# Altium PCB PCB.PcbDoc
Units mm, origin at the board's own origin, x right, y up, seen from the top; angles counter-clockwise.
Board outline 85 x 76 mm, 2 copper layers (Top Layer, Bottom Layer), stack 1.569 mm thick; 53 components, 43 nets, 226 pads, 47 vias.
Unrouted connection lines stored in the file: 40.
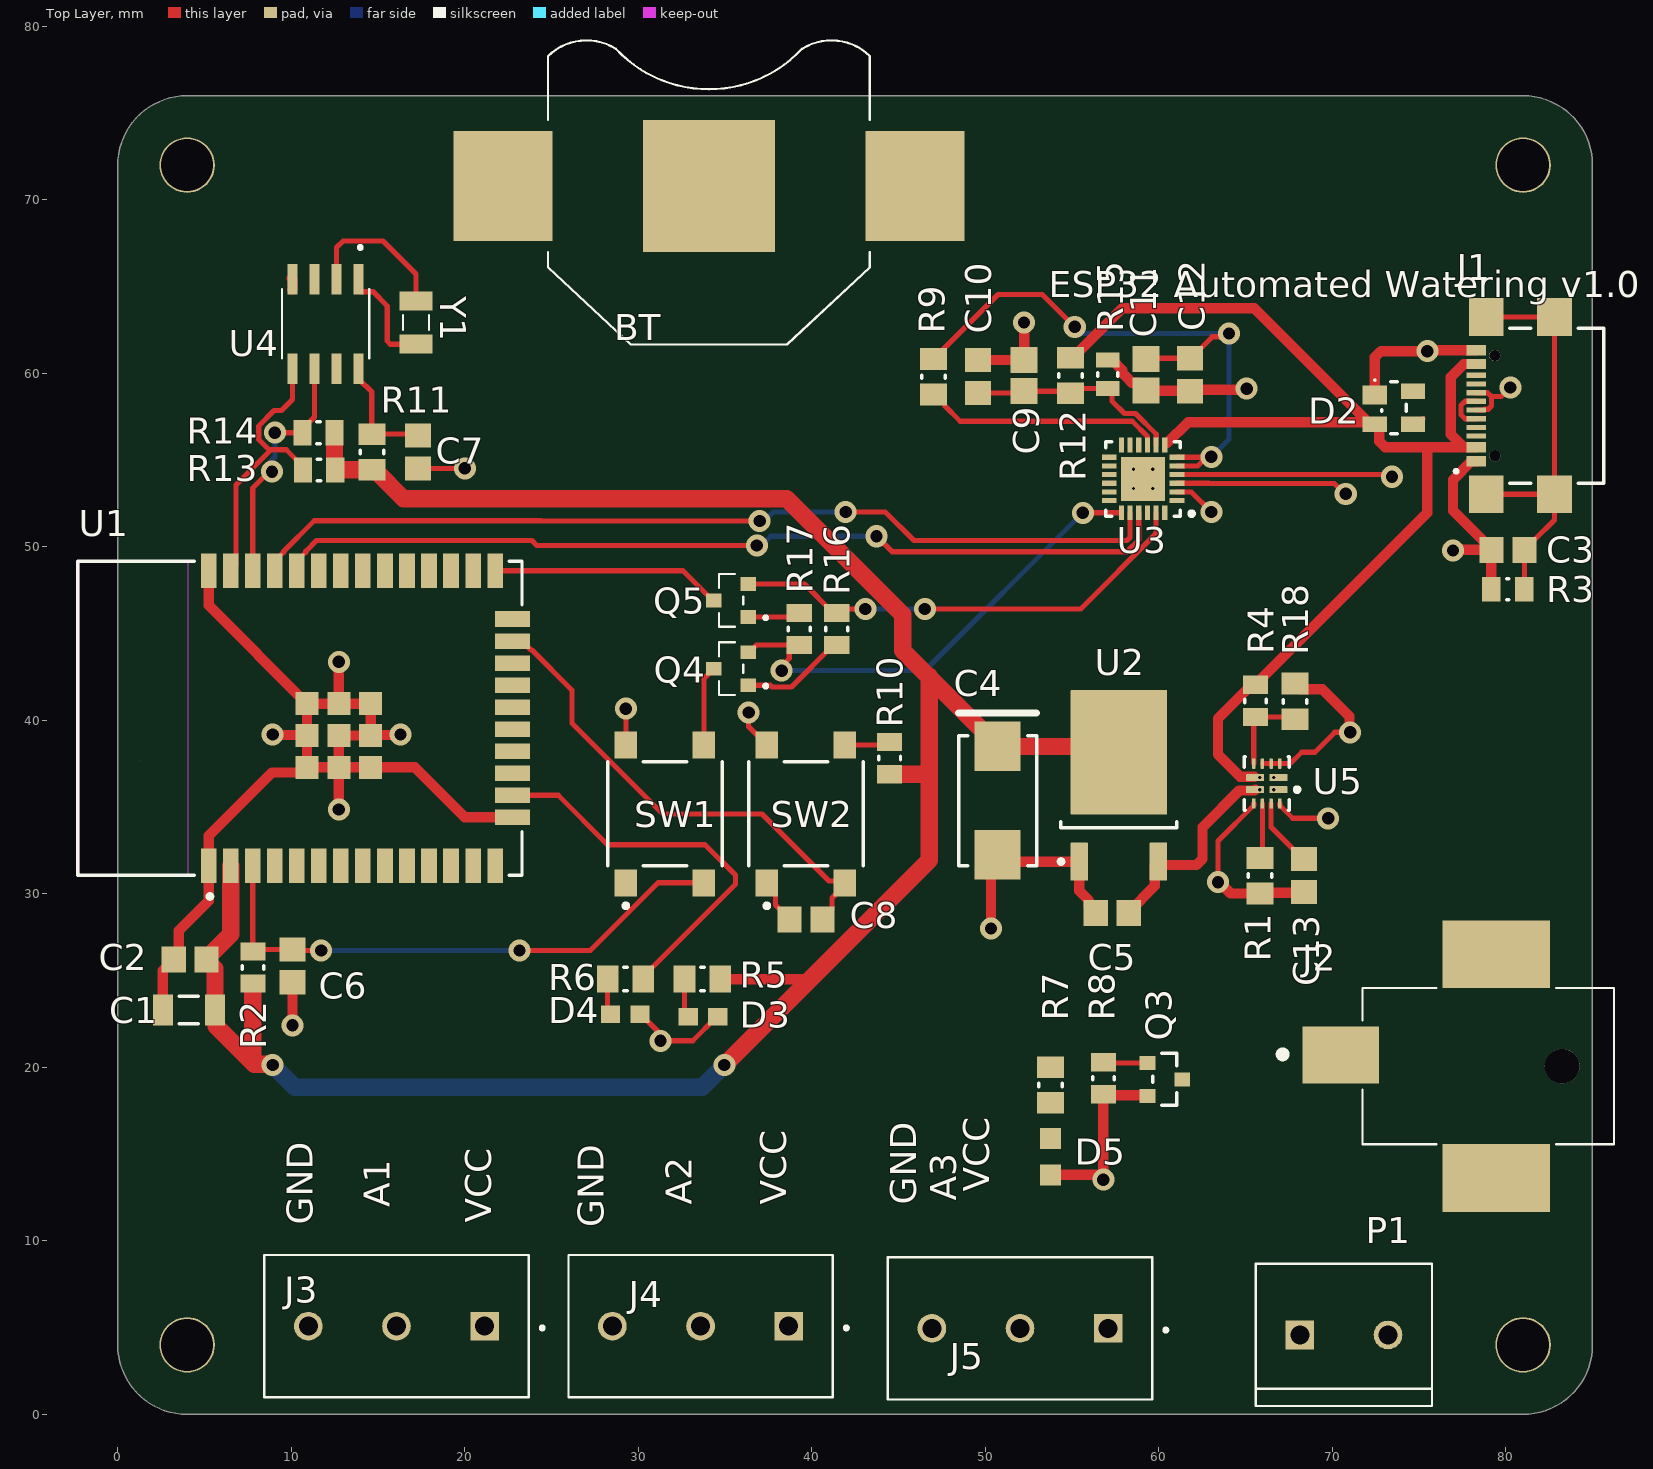
[diagram p0: Top Layer view]
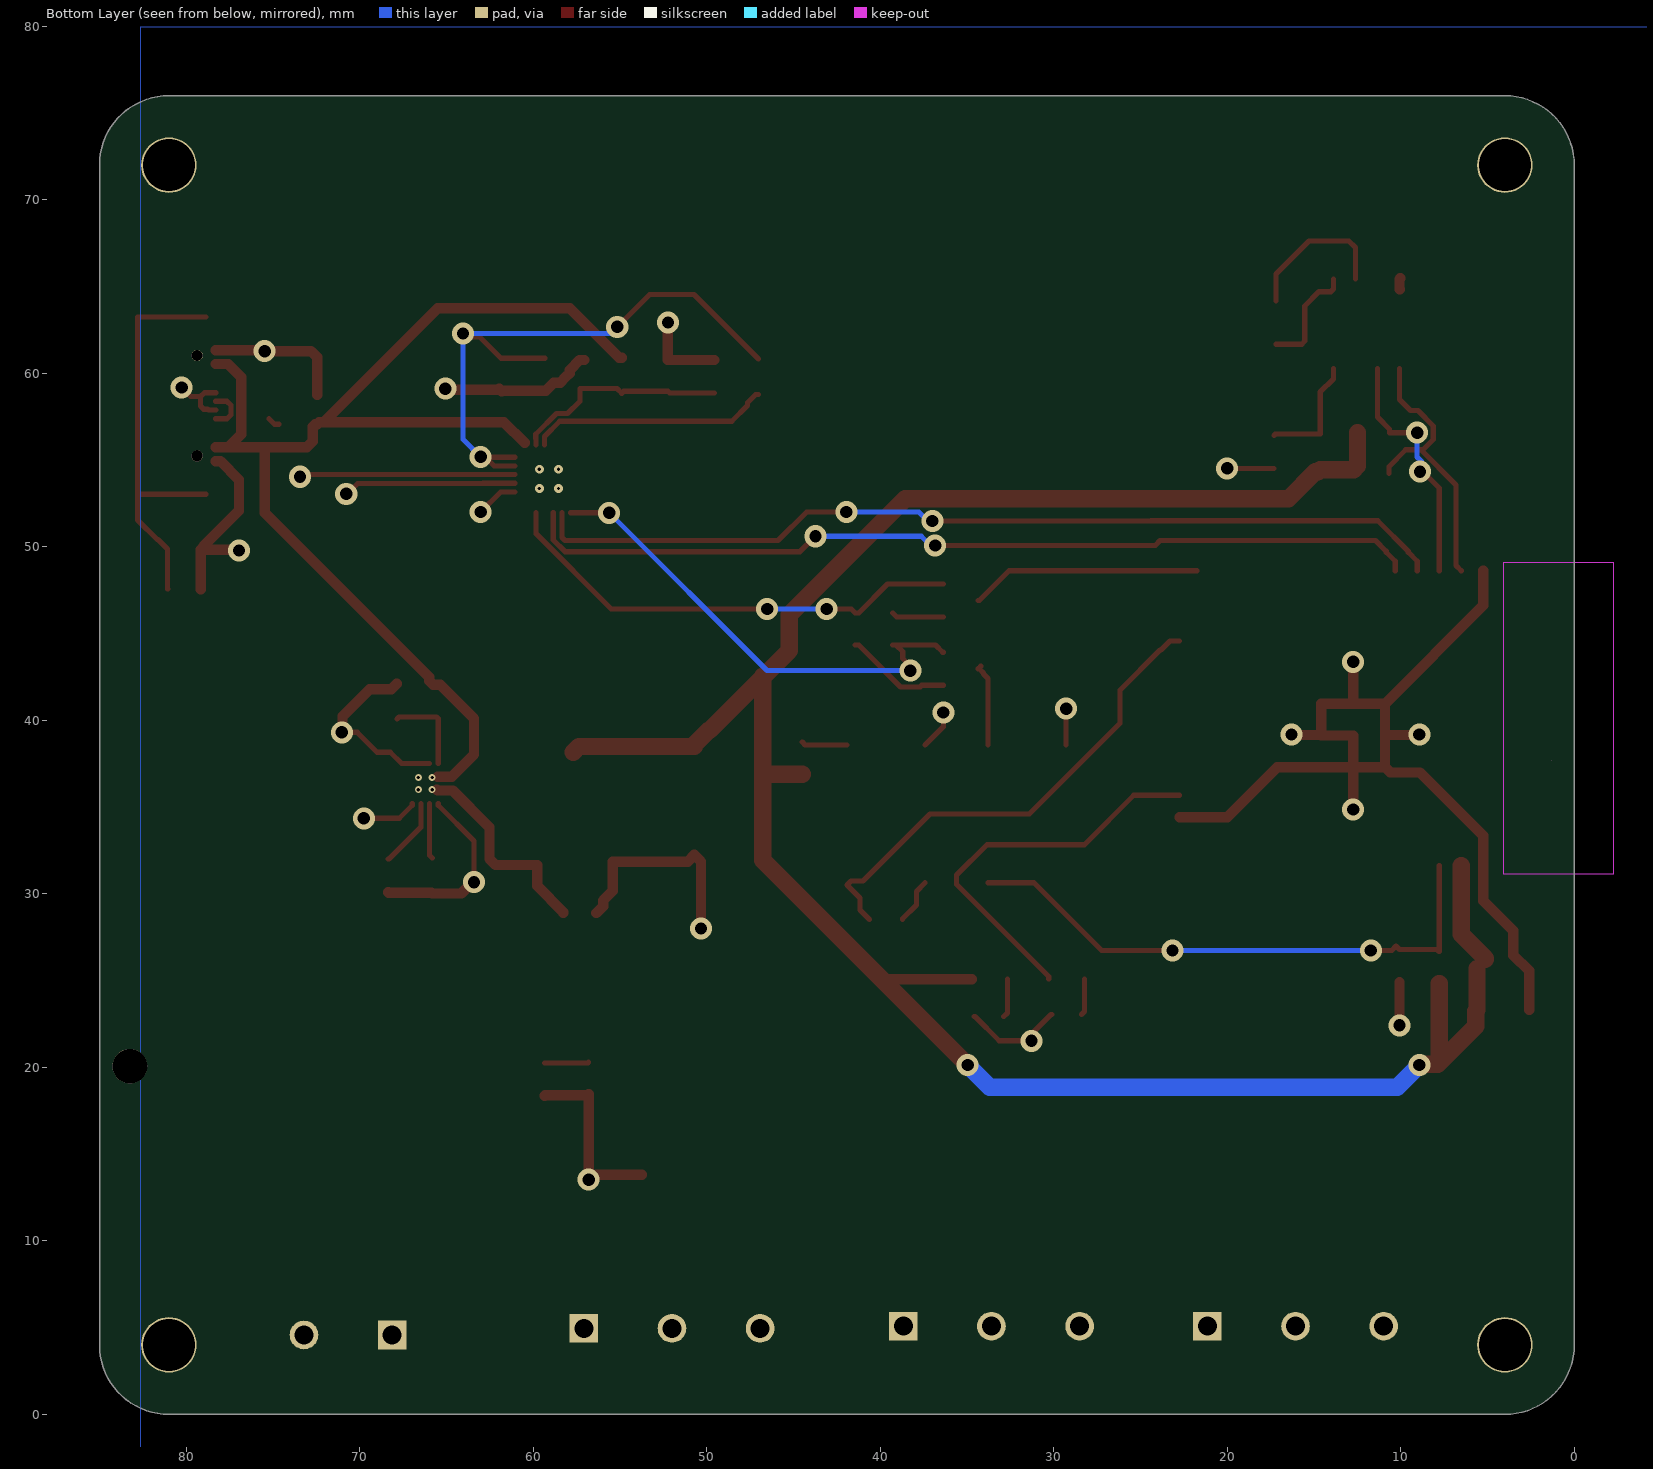
[diagram p1: Bottom Layer view, seen from below]

## Layer stack, top to bottom
Top Solder: solder mask 0.0254, SM-001, Dk 4
Top Layer: signal copper 0.035
Dielectric 1: core 1.4986, Core-043, Dk 4.3
Bottom Layer: signal copper 0.035
Bottom Solder: solder mask 0.0254, SM-001, Dk 4

## Board outline
0,4 ccw(c4,4) 4,0 81,0 ccw(c81,4) 85,4 85,72 ccw(c81,72) 81,76 4,76 ccw(c4,72) 0,72

## Design rules (kind name [scope] priority, off if disabled: settings)
Clearance [All] p1: gap=0.15 ignorepadtopadclearanceinfootprint=TRUE
MinimumSolderMaskSliver [All] p1: minsoldermaskwidth=0
PolygonConnect [All] p1: connectstyle=Relief reliefconductorwidth=0.254 reliefentries=4 polygonreliefangle="90 Angle" airgapwidth=0.254
RoutingVias [All] p1: holewidth=0.711 width=1.27 viastyle="Through Hole" minholewidth=0.711 minwidth=1.27 maxholewidth=0.711 maxwidth=1.27
SilkToSilkClearance [All] p1: silktosilkclearance=0
SilkToSolderMaskClearance [IsPad] p1: minsilkscreentomaskgap=0 clearancetoexposedcopper=TRUE
SolderMaskExpansion [All] p1: expansion=0.102 istentingtop=FALSE
UnConnectedPin [(InNet('EN') AND InComponent('SW1'))] p1:
Width Width_5 [InNet('NetP1_1')] p1: maxlimit=1 minlimit=1 preferedwidth=1 minimp=50.000000 maximp=50.000000 favimp=50.000000
Width Width_4 [InNet('NetBT_S1+')] p2: maxlimit=0.6 minlimit=0.6 preferedwidth=0.6 minimp=50.000000 maximp=50.000000 favimp=50.000000
Width Width_1 [InNet('NetC5_2')] p3: maxlimit=0.6 minlimit=0.6 preferedwidth=0.6 minimp=50.000000 maximp=50.000000 favimp=50.000000
Width "GND Width" [InNet('GND')] p4: maxlimit=0.6 minlimit=0.3 preferedwidth=0.6 minimp=50.000000 maximp=50.000000 favimp=50.000000
Width Width_3 [InNet('VBUS')] p5: maxlimit=0.6 minlimit=0.6 preferedwidth=0.6 minimp=50.000000 maximp=50.000000 favimp=50.000000
Width Width_2 [(InNet('VEXT 12V'))] p6: maxlimit=1 minlimit=0.5 preferedwidth=1 minimp=50.000000 maximp=50.000000 favimp=50.000000
Width "Width 3.3V" [InNet('V3.3')] p7: maxlimit=1 minlimit=0.6 preferedwidth=1 minimp=50.000000 maximp=50.000000 favimp=50.000000
Width [All] p8: maxlimit=0.3 minlimit=0.3 preferedwidth=0.3
27 further rules are at their usual default settings.

## Components (designator, comment, footprint, x,y, rotation, side; value= is the part's Value field where it differs from the comment)
BT "BK-868" BAT_BK-868 34.076,70.803 r0 top
C1 "22uF" CAPC1206(3216)190_N 4.104,23.305 r0 top
C2 "0.1uF" CAPC2013X135X45ML10T25 4.17,26.226 r0 top
C3 "10uF" CAPC2013X135X45ML10T25 80.127,49.823 r0 top
C4 "100uF" AVX-TAJD107K016RNJ-2_M 50.713,35.37 r270 top
C5 "10uF" CAPC2013X135X45ML10T25 57.317,28.893 r0 top
C6 "0.1uF" CAPC2013X135X45ML10T25 10.073,25.845 r90 top
C7 "10uF" CAPC2013X135X45ML10T25 17.312,55.47 r90 top
C8 "0.1uF" CAPC2013X135X45ML10T25 39.664,28.512 r0 top
C9 "4.7uF" CAPC2013X145X50ML20T25 52.237,59.87 r270 top
C10 "0.1uF" CAPC2013X135X45ML10T25 49.57,59.82 r270 top
C11 "4.7uF" CAPC2013X145X50ML20T25 59.264,59.912 r90 top
C12 "0.1uF" CAPC2013X135X45ML10T25 61.804,59.923 r90 top
C13 "0.1uF" CAPC2013X135X45ML10T25 68.366,31.052 r90 top
D2 "SP0503BAHTG" LFUS-SOT143-4_V 73.558,58.012 r0 top
D3 "POWER_LED" 0603 33.734,22.924 r180 top
D4 "USER_LED" 0603 29.258,23.051 r180 top
D5 "TAP_LED" DIOC200X125X110 53.753,14.846 r90 top
J1 "USB4110-GF-A" GCT_USB4110-GF-A 79.375,58.135 r90 top
J2 "2.1mm DC Jack" CUI_PJ-036AH-SMT-TR 70.498,20.716 r180 top
J3 "282837-3" TE_282837-3 16.065,5.08 r180 top
J4 "282837-3" TE_282837-3 33.591,5.08 r180 top
J5 "282837-3" TE_282837-3 52.006,4.953 r180 top
P1 "282837-2" TE_282837-2 70.675,4.572 r0 top
Q3 "DMG2302UK-7" FP-SOT23-MFG 60.349,19.307 r0 top
Q4 "MMSS8050-H-TP" TRANS_MMSS8050-H-TP 35.346,42.974 r180 top
Q5 "MMSS8050-H-TP" TRANS_MMSS8050-H-TP 35.346,46.911 r180 top
R1 "22K1 0805" RESC2013X50X30ML20T20 65.826,31.043 r90 top
R2 "10K 0805" RESC2013X50X30NL20T20 7.787,25.754 r270 top
R3 "1M" RESC0805(2012)_N 80.116,47.562 r0 top value="1000000.00 Ohm"
R4 "10K" RESC2013X50X30NL20T20 65.572,41.121 r90 top
R5 "165R 0805" RESC2013X50X30ML20T20 33.695,25.083 r0 top
R6 "165R 0805" RESC2013X50X30ML20T20 29.258,25.083 r0 top
R7 "165R 0805" RESC2013X50X30ML20T20 53.753,18.987 r90 top
R8 "10K 0805" RESC2013X50X30NL20T20 56.809,19.368 r90 top
R9 "1K 0805" RESC2013X50X30ML20T20 47.022,59.801 r270 top
R10 "10K 0805" RESC2013X50X30NL20T20 44.49,37.819 r270 top
R11 "1K 0805" RESC2013X50X30ML20T20 14.645,55.47 r90 top
R12 "22K1 0805" RESC2013X50X30ML20T20 54.904,59.881 r270 top
R13 "10K 0805" RESC2013X50X30NL20T20 11.605,54.42 r0 top
R14 "10K 0805" RESC2013X50X30NL20T20 11.569,56.579 r0 top
R15 "47K5 0805" RESC2013X50X30LL20T20 57.063,59.944 r270 top
R16 "10K 0805" RESC2013X50X30NL20T20 41.442,45.268 r90 top
R17 "10K 0805" RESC2013X50X30NL20T20 39.283,45.268 r270 top
R18 "5K" RESC2013X50X30ML20T20 67.858,41.094 r270 top
SW1 "B3S-1000" OMRON-B3S-1000-4_V 31.536,34.608 r90 top
SW2 "B3S-1000" OMRON-B3S-1000-4_V 39.664,34.608 r90 top
U1 "ESP32-WROOM-32D" FP-ESP32-WROOM-32D-MFG 10.5,40.123 r90 top
U2 "LM1117DT-3.3/NOPB" NDP0003B_M 57.698,36.259 r90 top
U3 "CP2102N-A02-GQFN24" SLAB-QFN-24-2550x2550TP_A_V 59.095,53.912 r180 top
U4 "PCF8523T" *SOIC127P600X175-8N 11.978,62.847 r270 top
U5 "TPS2121RUXR" FP-RUX0012A-MFG 66.226,36.355 r180 top
Y1 "32.768kHz" XTAL_ECS-.327-12.5-34B-TR 17.185,62.929 r270 top

## Footprints (in the part's own frame and the unit in brackets; to place one, negate y for a bottom-side part, rotate by r counter-clockwise, add the part's x,y. Pads: shape width x height; smd on the part's side, far side on the other; paste and mask are expansions set on the pad)
0603 [mm]
  rect 1.1x1 smd: 1(-0.85,0) 2(0.85,0)
*SOIC127P600X175-8N [mm]
  rect 1.75x0.59 smd: 1(-2.585,1.905) 2(-2.585,0.635) 3(-2.585,-0.635) 4(-2.585,-1.905) 5(2.585,-1.905) 6(2.585,-0.635) 7(2.585,0.635) 8(2.585,1.905)
  silkscreen extent -4.51,-2.51 2,2.51
AVX-TAJD107K016RNJ-2_M [mm] "Molded, 2-Leads, Body 7.5x4.5mm, IPC Low Density"
  rect 2.85x2.65 smd: 1(-3.125,0) 2(3.125,0)
  silkscreen extent -5.05,-2.25 3.75,2.25, body extent -3.75,-2.25 3.75,2.25, height 3.1
BAT_BK-868 [mm]
  rect 7.62x7.62 smd paste-5: NEG(0,0)
  rect 5.72x6.35 smd: S1+(-11.87,0) S2+(11.87,0)
  silkscreen extent -9.27,-9.14 9.27,8.39
CAPC1206(3216)190_N [mm] "Chip Capacitor, Body 3.2x1.6mm, Height 1.9mm, IPC Medium Density"
  rect 1.15x1.8 smd: 1(-1.5,0) 2(1.5,0)
  silkscreen extent -0.55,-0.8 0.55,0.8, body extent -1.7,-0.9 1.7,0.9, height 1.9
CAPC2013X135X45ML10T25 [mm] "Chip Capacitor, 2-Leads, Body 2.10x1.35mm, IPC Low Density"
  rect 1.4x1.5 smd: 1(-0.95,0) 2(0.95,0)
  body extent -1.05,-0.67 1.05,0.67, height 1.35
CAPC2013X145X50ML20T25 [mm] "Chip Capacitor, 2-Leads, Body 2.00x1.25mm, IPC Low Density"
  rect 1.5x1.55 smd: 1(-0.9,0) 2(0.9,0)
  body extent -1.1,-0.72 1.1,0.72, height 1.45
CUI_PJ-036AH-SMT-TR [mm]
  rect 4.4x3.3 smd: 1(0,0)
  rect 6.2x3.9 smd: 2(-8.95,7.1) 3(-8.95,-5.8)
  round 2 hole 2 unplated: ""(-12.75,0.65)
  silkscreen extent -15.75,-3.85 3.56,5.15
DIOC200X125X110 [mm]
  rect 1.2x1.2 smd: NEG(-1.05,0) POS(1.05,0)
FP-ESP32-WROOM-32D-MFG [mm]
  rect 2x0.9 smd: 1(-8.5,5.26) 2(-8.5,3.99) 3(-8.5,2.72) 4(-8.5,1.45) 5(-8.5,0.18) 6(-8.5,-1.09) 7(-8.5,-2.36) 8(-8.5,-3.63) 9(-8.5,-4.9) 10(-8.5,-6.17) 11(-8.5,-7.44) 12(-8.5,-8.71) 13(-8.5,-9.98) 14(-8.5,-11.25) 25(8.5,-11.25) 26(8.5,-9.98) 27(8.5,-8.71) 28(8.5,-7.44) 29(8.5,-6.17) 30(8.5,-4.9) 31(8.5,-3.63) 32(8.5,-2.36) 33(8.5,-1.09) 34(8.5,0.18) 35(8.5,1.45) 36(8.5,2.72) 37(8.5,3.99) 38(8.5,5.26)
  rect 0.9x2 smd: 15(-5.715,-12.25) 16(-4.445,-12.25) 17(-3.175,-12.25) 18(-1.905,-12.25) 19(-0.635,-12.25) 20(0.635,-12.25) 21(1.905,-12.25) 22(3.175,-12.25) 23(4.445,-12.25) 24(5.715,-12.25)
  rect 1.33x1.33 smd: 39(-2.835,-2.24) 39(-2.835,-0.405) 39(-2.835,-4.075) 39(-1,-0.405) 39(-1,-4.075) 39(-1,-2.24) 39(0.835,-0.405) 39(0.835,-4.075) 39(0.835,-2.24)
  Keep-Out Layer region: -9,6.45 9,6.45 9,12.75 -9,12.75
  Keep-Out Layer region: -9,6.45 9,6.45 9,12.75 -9,12.75
  silkscreen extent -10.4,-12.8 9.05,12.8, body extent -9.6,-13.35 9.6,12.9, height 0.25
FP-RUX0012A-MFG [mm]
  rrect25% 1.05x0.4 smd paste+0 mask+0: 1(-0.675,0.35) 2(-0.675,-0.35) 7(0.675,-0.35) 8(0.675,0.35)
  rrect50% 0.2x0.6 smd paste+0 mask+0: 3(-0.75,-1.15) 4(-0.25,-1.15) 5(0.25,-1.15) 6(0.75,-1.15) 9(0.75,1.15) 10(0.25,1.15) 11(-0.25,1.15) 12(-0.75,1.15)
  silkscreen extent -1.88,-1.55 1.3,1.55, body extent -1.3,-1.55 1.3,1.55, height 0.25
FP-SOT23-MFG [mm]
  rect 0.9x0.8 smd: 1(-1,0.95) 2(-1,-0.95) 3(1,0)
  silkscreen extent -0.7,-1.5 0.7,1.5, body extent -1.55,-1.6 1.55,1.6, height 0.25
GCT_USB4110-GF-A [mm]
  rect 0.6x1.15 smd: A1/B12(-3.2,1.075) A4/B9(-2.4,1.075) B1/A12(3.2,1.075) B4/A9(2.4,1.075)
  rect 0.3x1.15 smd: A5(-1.25,1.075) A6(-0.25,1.075) A7(0.25,1.075) A8(1.25,1.075) B5(1.75,1.075) B6(0.75,1.075) B7(-0.75,1.075) B8(-1.75,1.075)
  rect 2.18x2 smd: S1(-5.11,0.5) S2(5.11,0.5) S3(-5.11,-3.43) S4(5.11,-3.43)
  round 0.65 hole 0.65 unplated: ""(-2.89,0) ""(2.89,0)
  silkscreen extent -4.47,-6.28 4.47,2.33
LFUS-SOT143-4_V [mm] "SOT143, 4-Leads, Body 3.04x1.4mm, Pitch 1.90mm"
  rect 1.4x1.1 smd: 1(-1.1,0.75)
  rect 1.4x0.9 smd: 2(-1.1,-0.95) 3(1.1,-0.95) 4(1.1,0.95)
  silkscreen extent -1.15,-1.5 0.7,1.65, body extent -0.7,-1.52 0.7,1.52, height 1.22
NDP0003B_M [mm] "D-PAK, 4-Leads, Body 6.1x6.6mm, Pitch 2.29mm, Lead Span 9.7mm, IPC Low Density"
  rrect10% 2.2x1 smd: 1(-4.4,2.28) 3(-4.4,-2.28)
  rrect2% 7.2x5.55 smd: 4(1.9,0)
  silkscreen extent -4.52,-3.35 -2.1,3.45, body extent -2.45,-3.35 3.75,3.35, height 2.38
OMRON-B3S-1000-4_V [mm] "SMD, 4-Leads, Body 6.6x6mm"
  rect 1.55x1.3 smd: 1(-3.975,2.25) 2(3.975,2.25) 3(-3.975,-2.25) 4(3.975,-2.25)
  silkscreen extent -5.42,-3.3 3,3.3, body extent -4.5,-3.3 4.5,3.3, height 4.4
RESC0805(2012)_N [mm] "Chip Resistor, Body 2.0x1.3mm, IPC Medium Density"
  rect 1.05x1.4 smd: 1(-0.95,0) 2(0.95,0)
  silkscreen extent -0.05,-0.6 0.05,0.6, body extent -1.1,-0.67 1.1,0.68, height 0.7
RESC2013X50X30LL20T20 [mm] "Chip Resistor, 2-Leads, Body 2.00x1.25mm, IPC High Density"
  rect 0.85x1.35 smd: 1(-0.825,0) 2(0.825,0)
  silkscreen extent -0.1,-0.58 0.1,0.58, body extent -1.1,-0.72 1.1,0.72, height 0.5
RESC2013X50X30ML20T20 [mm] "Chip Resistor, 2-Leads, Body 2.00x1.25mm, IPC Low Density"
  rect 1.25x1.55 smd: 1(-1.025,0) 2(1.025,0)
  silkscreen extent -0.1,-0.67 0.1,0.67, body extent -1.1,-0.72 1.1,0.72, height 0.5
RESC2013X50X30NL20T20 [mm] "Chip Resistor, 2-Leads, Body 2.00x1.25mm, IPC Medium Density"
  rect 1.05x1.45 smd: 1(-0.925,0) 2(0.925,0)
  silkscreen extent -0.1,-0.63 0.1,0.63, body extent -1.1,-0.72 1.1,0.72, height 0.5
SLAB-QFN-24-2550x2550TP_A_V [mm] "QFN, 6-Leads, Body 4x4mm, Pitch 0.5mm, Thermal Pad 2.55x2.55mm"
  rect 0.85x0.3 smd: 1(-1.95,1.25) 2(-1.95,0.75) 3(-1.95,0.25) 4(-1.95,-0.25) 5(-1.95,-0.75) 6(-1.95,-1.25) 13(1.95,-1.25) 14(1.95,-0.75) 15(1.95,-0.25) 16(1.95,0.25) 17(1.95,0.75) 18(1.95,1.25)
  rect 0.3x0.85 smd: 7(-1.25,-1.95) 8(-0.75,-1.95) 9(-0.25,-1.95) 10(0.25,-1.95) 11(0.75,-1.95) 12(1.25,-1.95) 19(1.25,1.95) 20(0.75,1.95) 21(0.25,1.95) 22(-0.25,1.95) 23(-0.75,1.95) 24(-1.25,1.95)
  rect 2.55x2.55 smd: 25(0,0)
  silkscreen extent -2.93,-2.15 2.15,2.15, body extent -2,-2 2,2, height 0.8
TE_282837-2 [mm]
  rect 1.65x1.65 hole 1.1: 1(-2.54,0)
  round 1.65 hole 1.1: 2(2.54,0)
  silkscreen extent -5.08,-4.1 5.08,4.1
TE_282837-3 [mm]
  rect 1.65x1.65 hole 1.1: 1(-5.08,0)
  round 1.65 hole 1.1: 2(0,0) 3(5.08,0)
  silkscreen extent -8.5,-4.1 7.62,4.1
TRANS_MMSS8050-H-TP [mm]
  rect 0.9x0.8 smd: 1(-1,0.95) 2(-1,-0.95) 3(1,0)
  silkscreen extent -2.1,-1.52 0.7,1.52
XTAL_ECS-.327-12.5-34B-TR [mm]
  rect 1.1x1.9 smd: 1(-1.25,0) 2(1.25,0)
  silkscreen extent -0.44,-0.75 0.44,0.75

## Part data
BT: "BATTERY RETAINER COIN 16MM SMD", Package=None, Availability=Unavailable, DigiKey-Purchase-URL=https://snapeda.com/shop?store=DigiKey&id=4219637, MF=MPD, MP=BK-868, Price=None, SnapEDA_Link=https://www.snapeda.com/parts/BK-868/Memory%20Protection%20Devices/view-part/4219637/?ref=snap
C1: library part CMP-1037-04992-1, "CAP 22uF 16V ±10% 1206 (3216 Metric) Thickness 1.9mm SMD", Case-EIA=1206, Case-Metric=3216, Rated Voltage="16 V", Tolerance=Â±10%, Max Thickness="1.9 mm", Technology=SMT
C2 C6 C8 C10 C12 C13: library part CMP-2100-03644-1, "Chip Capacitor, 0.1 uF, +/- 10%, 50 V, -55 to 125 degC, 0805 (2012 Metric), RoHS, Tape and Reel", Capacitance=100nF, Case Code (Imperial)=0805, Case Code (Metric)=2012, Dielectric=X7R, Dielectric Material=Ceramic, Insulation Resistance=10GR, Manufacturer=Murata, Max Operating Temperature=125degC, Min Operating Temperature=-55degC, Package Description="2-Pin Surface Mount Device, Body 2 x 1.25 mm", Package Quantity=1, Tolerance=10%, Voltage=50V, Case/Package=0805, Datasheet URL=http://psearch.en.murata.com/capacitor/product/GRM21BR71H104KA01%23.pdf, Datasheet Version=42675.0, Depth=1.25mm, Height=1.25mm, Lead Free=LeadFree, Length=2mm, Manufacturer URL=http://www.murata.com/, Material=Ceramic, Mount=SurfaceMount, Number of Pins=2, Package Reference=0805, Packaging=TapeandReel, Radiation Hardening=No, REACH SVHC=Unknown, RoHSCompliant=true, Termination=SMD/SMT, Thickness=0.053inch, Voltage Rating=50V, Voltage Rating (DC)=50V, Width=0.049inch
C3 C5 C7: library part CMP-2007-03541-1, Manufacturer=Murata, Part Number=GRM21BR61E106KA73L
C4: library part CMP-2000-05064-1, "Cap Tant Solid, 100 uF, +/- 10%, 16 V, -55 to 125 degC, 2-Pin SMD (2917), RoHS, Tape and Reel", Capacitance=100000000pF, Case Code=D, Case Style=Molded, Manufacturer=AVX, Operating Temp Range=-55Cto125C, Package / Case=7343-31, Tolerance (+ or -)=10%, Voltage=16VDC, Construction=SMTChip, Datasheet URL=https://datasheet.ciiva.com/26341/559463-da-01-en-tacc-d-7-3-mm-x-4-3-mm-x-2-9-mm-100-uf-26341798.pdf, Datasheet Version=Apr-13, DCL=16uA, DF=6%, ESR=0.6ohm, Failure Rate=NotRequired, Insulation=NotRequired, Lead Spacing (nom)=NotRequiredmm, Length W/Weld=NotRequiredmm, Length W/Weld (max)=NotRequiredmm, Manufacturer URL=http://www.avx.com/, Mounting Style=SurfaceMount, Packaging=TapeandReel, Polarity=Polar, Product Depth (mm)=4.3mm, Product Diameter (mm)=NotRequiredmm, Product Height (mm)=2.9mm, Product Length (mm)=7.3mm, Rad Hardened=No, Seal=NotRequired, Seated Plane Height=NotRequiredmm, Wire Form=NotRequired
C9 C11: library part CMP-2007-01010-1, "0805 Tant", Manufacturer=Kemet, Part Number=C0805C475K3PACTU
  C9: ComponentLink1Description="New link"
D2: library part CMP-2000-05191-1, "TVS Diode Array, 30 pF, 30 KV, -40 to 85 degC, 4-Pin SOT143, RoHS, Tape and Reel", Capacitance Value=30pF, Clamping Voltage=8V, Leakage Current=0.1uA, Manufacturer=Littelfuse, Operating Temp Range=-40Cto85C, Operating Temperature Classification=Industrial, Operating Temperature Max Deg. C=85C, Operating Temperature Min Deg. C=-40C, Package / Case=SOT-143, Reverse Stand-off Voltage=5.5(Min)V, Working Voltage=5.5V, Working Voltage (Max)=5.5V(Min), Clamping Voltage (Max)=8V, Configuration=Triple, Datasheet URL=https://datasheet.ciiva.com/15143/getdatasheetpartid-116020-15143550.pdf, Datasheet Version=Dec-13, Direction Type=Uni-Directional, Leakage Current (Max)=0.1uA, Manufacturer URL=http://www.littelfuse.com/, Mounting=SurfaceMount, Mounting Style=SurfaceMount, Number of Elements=3, Package Type=SOT-143, Packaging=TapeandReel, Pin Count=3+Tab, Polarity=Uni-Directional, Product Depth (mm)=1.4mm, Product Height (mm)=1.05mm, Product Length (mm)=3.04mm, Rad Hardened=No, Suppressor Type=TVS
D3: library part LTST-C191KSKT, "Yellow 591nm LED Indication - Discrete 2.1V 0603 _1608 Metric_", Package="0603 Lite-On", Digi-Key_Part_Number=160-1448-1-ND, Digi-Key_Purchase_URL=https://www.digikey.com/product-detail/en/lite-on-inc/LTST-C191KSKT/160-1448-1-ND/386838?utm_source=snapeda&utm_medium=aggregator&utm_campaign=symbol, MF="Lite-On Inc.", MP=LTST-C191KSKT, SnapEDA_Link=https://www.snapeda.com/parts/LTST-C191KSKT/Lite-On%20Inc./view-part/265076/?ref=snap
D4: library part LTST-C191KRKT, "Red 631nm LED Indication - Discrete 2V 0603 _1608 Metric_", Package="0603 Lite-On", Digi-Key_Part_Number=160-1447-1-ND, Digi-Key_Purchase_URL=https://www.digikey.in/product-detail/en/lite-on-inc/LTST-C191KRKT/160-1447-1-ND/386836?utm_source=snapeda&utm_medium=aggregator&utm_campaign=symbol, MF="Lite-On Inc.", MP=LTST-C191KRKT, SnapEDA_Link=https://www.snapeda.com/parts/LTST-C191KRKT/Lite-On%20Inc./view-part/234319/?ref=snap
D5: library part LTST-C171TBKT, "Blue 470nm LED Indication - Discrete 3.3V 0805 _2012 Metric_", Package="0805 Lite-On", Availability=Unavailable, MF="Lite-On Inc.", MP=LTST-C171TBKT, Price=None, SnapEDA_Link=https://www.snapeda.com/parts/LTST-C171TBKT/Lite-On%20Inc./view-part/400349/?ref=snap
J1: "USB-C _USB TYPE-C_ USB 2.0 Receptacle Connector 24 _16+8 Dummy_ Position Surface Mount, Right Angle; Through Hole", Package=None, Digi-Key_Part_Number=2073-USB4110-GF-A-1-ND, Digi-Key_Purchase_URL=https://www.digikey.com/product-detail/en/gct/USB4110-GF-A/2073-USB4110-GF-A-1-ND/10384548?utm_source=snapeda&utm_medium=aggregator&utm_campaign=symbol, MF=GCT, MP=USB4110-GF-A, SnapEDA_Link=https://www.snapeda.com/parts/USB4110-GF-A/Global%20Connector%20Technology/view-part/4001167/?ref=snap
J2: library part PJ-036AH-SMT-TR, "2.0 x 6.3 mm, 5.0 A, Horizontal, Surface Mount _SMT_, Dc Power Jack Connector", Package=None, Availability=Unavailable, CUI_purchase_URL=https://www.cuidevices.com/product/interconnect/connectors/dc-power-connectors/jacks/pj-036ah-smt-tr?utm_source=snapeda.com&utm_medium=referral&utm_campaign=snapedaBOM, MF="CUI Devices", MP=PJ-036AH-SMT-TR, Price=None, SnapEDA_Link=https://www.snapeda.com/parts/PJ-036AH-SMT-TR/CUI%20Devices/view-part/517505/?ref=snap
J3 J4 J5: "Wire to Board 3 Position 5.08 mm Pitch 30-16 AWG Euro Style Terminal Block", Package=None, Supplier Part Number 1=A113321-ND, Digi-Key_Part_Number=A113321-ND, Digi-Key_Purchase_URL=https://www.digikey.in/product-detail/en/te-connectivity-amp-connectors/282837-3/A113321-ND/2187974?utm_source=snapeda&utm_medium=aggregator&utm_campaign=symbol, MF="TE Connectivity", MP=282837-3, SnapEDA_Link=https://www.snapeda.com/parts/282837-3/TE%20Connectivity%20AMP%20Connectors/view-part/2765182/?ref=snap, Supplier 1=Digi-Key, TE_purchase_URL=https://www.te.com/usa-en/product-282837-3.html?te_bu=Cor&te_type=disp&te_campaign=seda_glo_cor-seda-global-disp-prtnr-fy19-seda-model-bom-cta_sma-317_1&elqCampaignId=32493
P1: "Connector Terminal Blocks Receptacle 2 Position 5.08mm Solder Straight Thru-Hole 13.5A/Contact", Package=None, Supplier Part Number 1=A113320-ND, Digi-Key_Part_Number=A113320-ND, Digi-Key_Purchase_URL=https://www.digikey.in/product-detail/en/te-connectivity-amp-connectors/282837-2/A113320-ND/2187973?utm_source=snapeda&utm_medium=aggregator&utm_campaign=symbol, MF="TE Connectivity", MP=282837-2, SnapEDA_Link=https://www.snapeda.com/parts/282837-2/TE%20Connectivity%20AMP%20Connectors/view-part/2549980/?ref=snap, Supplier 1=Digi-Key, TE_purchase_URL=https://www.te.com/usa-en/product-282837-2.html?te_bu=Cor&te_type=disp&te_campaign=seda_glo_cor-seda-global-disp-prtnr-fy19-seda-model-bom-cta_sma-317_1&elqCampaignId=32493
Q3: library part CMP-12801-000001-1, "MOSFET N-CH 20V 2.8A SOT23", Continuous Drain Current=2.8A, Drain To Source Breakdown Voltage=20V, Drain To Source Resistance=61mΩ, Gate To Source Voltage=12V, Input Capacitace At Vds="130pF @ 10V", Manufacturer="Diodes Inc.", Max Forward Diode Voltage=1.2V, Max Junction Temp=+150°C, Package=SOT23, Power Dissipation=0.66W, Pulse Drain Current=12A, Temperature="-55°C to +150°C", Temperature Range Low=-55°C, Typ Forward Diode Voltage=0.7V, Automotive=Yes, Automotive Grade="Grade 0", Category=Trans, ComponentLink2Description=Datasheet, ComponentLink2URL=https://www.diodes.com/assets/Datasheets/DMG2302UK.pdf, Depletion Mode=False, Device Class L1="Discrete Semiconductors", Device Class L2=Transistors, Device Class L3=MOSFETs, Digikey Description="MOSFET N-CH 20V 2.8A SOT23", Drain To Source Voltage=20V, Footprint Url=https://www.diodes.com/assets/Package-Files/SOT23.pdf, Gate Charge At Vgs="2.8nC @ 10V", Height=1.1mm, Lead Free=Yes, Manufacturer Part Number=DMG2302UK-7, Number of Channels=1, Number Of N Channels=1, Octopart=https://octopart.com/dmg2302uk-7-diodes+inc.-73850182, Reverse Recovery Charge=0.5nC, Reverse Recovery Time=5.3ns, RoHS=TRUE, Rthja Max=192°C/W, Standoff Height=0.013mm, Temperature Range High=+150°C, Threshold Vgs Max=1V, Threshold Vgs Min=0.3V, Turn Off Delay Time=4.2ns, Turn On Delay Time=0.6ns
Q4 Q5: "Bipolar _BJT_ Transistor NPN 25V 1.5A 100MHz 625mW Surface Mount SOT-23", Package="SOT-23 Micro Commercial", Availability=Unavailable, MF="Micro Commercial", MP=MMSS8050-H-TP, Price=None, SnapEDA_Link=https://www.snapeda.com/parts/MMSS8050-H-TP/Micro%20Commercial/view-part/423878/?ref=snap
R1 R12: library part CMP-2001-03689-1, Manufacturer="Vishay Dale", Part Number=CRCW080522K1FKEA
R2 R4 R8 R10 R13 R14 R16 R17: library part CMP-2001-04909-1, Manufacturer="Vishay Dale", Part Number=CRCW080510K0FKEB
R3: library part CMP-1013-00849-1, "1M 0.125W 1% 0805 (2012 Metric)  SMD", Case-EIA=0805, Case-Metric=2012, Power="0.125 W", Tolerance="1 %", Technology=SMT
R5 R6 R7: library part CMP-2001-04978-1, Manufacturer="Vishay Dale", Part Number=CRCW0805165RFKEA
R9 R11: library part CMP-2001-03596-1, Manufacturer="Vishay Dale", Part Number=CRCW08051K00FKEB
R15: library part CMP-2001-03941-1, Manufacturer="Vishay Dale", Part Number=CRCW080547K5FKEA
R18: library part CMP-2001-04239-1, Manufacturer="Vishay Dale", Part Number=CRCW08055K00FKTA
SW1 SW2: library part CMP-1677-00001-4, "Sealed Tactile Switch, SPST-NO, 3 to 24 V, -25 to 70 degC, 4-Pin SMD, RoHS, Bulk", Current Rating="50 mA", Manufacturer=Omron, Max Operating Temperature="70 degC", Min Operating Temperature="-25 degC", Package Quantity=1500, Voltage Rating="24 V", ComponentLink1Description="Manufacturer URL", ComponentLink1URL=http://www.omron.com/, ComponentLink2Description=Datasheet, ComponentLink2URL=http://www.omron.com/ecb/products/pdf/en-b3s.pdf, Contact Plating=Silver, DatasheetVersion=10/2014, Height="4.3 mm", Length="6.6 mm", Mount="Surface Mount", Mounting Technology="Surface Mount", PackageDescription="4-Pin Surface Mount Device, Body 6.6 x 6 mm", PackageReference=B3S-1000, Packaging=Bulk, REACH SVHC="No SVHC", RoHSCompliant=true
U1: library part CMP-194065-000003-1, "WIFI MODULE 32MBITS SPI FLASH", Manufacturer="Espressif Systems", Max Frequency=2484MHz, Max Supply Voltage=3.6V, Min Supply Voltage=3V, Nominal Supply Current=500mA, Temperature="-40°C to +85°C", Temperature Range High=+85°C, Temperature Range Low=-40°C, Automotive=No, Bandwidth=72MHz, Category=UNK, ComponentLink2Description=Datasheet, ComponentLink2URL=https://www.espressif.com/sites/default/files/documentation/esp32-wroom-32d_esp32-wroom-32u_datasheet_en.pdf, Data Rate=150Mbits/s, Device Class L1="Integrated Circuits (ICs)", Device Class L2="RF Semiconductors and Devices", Device Class L3=Transceivers, Digikey Description="WIFI MODULE 32MBITS SPI FLASH", Height=3.2mm, Interface=I2C,SPI,UART,Ethernet,I2S,Other, Lead Free=Yes, Manufacturer Part Number=ESP32-WROOM-32D, Mouser Description="Wi-Fi/BT BLE Module ESP32-D0WD, SPI Flash, UART, P", Number Of Adc Channels=16, Number Of Gpio=32, Octopart=https://octopart.com/esp32-wroom-32d-espressif+systems-91040050, Package=ESP32-WROOM-32D, RoHS=TRUE, Sensitivity=-98dBm
U2: library part CMP-0062-00703-3, "800mA Low-Dropout Linear Regulator, 3-pin TO-252, Pb-Free", Manufacturer="Texas Instruments", PackageTopMarking=NSUZXYTT*LM1117*DT-3.3, PowerWise=N, Code_JEDEC=TO-252-AA, ComponentLink1Description="Datasheet URL", ComponentLink1URL=http://www.ti.com/general/docs/lit/getliterature.tsp?genericPartNumber=LM1117-N&fileType=pdf, CompType="LDO IC", PackageDescription="TO252, Molded, Jedec, 6.8 x 6.10 x 2.30mm Body, 3 Lead, 2.28mm Pitch, Surface Mount", PackageReference=NDP0003B, PinCount=3, RoHS=Y
U3: library part CMP-2000-07570-1, "USBXpress(TM) Family, 4 GPIOs, 2.2 to 3.6 V, -40 to 85 degC, 24-Pin QFN, RoHS", Case\/Package=QFN, Manufacturer="Silicon Labs", Max Operating Temperature=85degC, Max Supply Voltage=3.6V, Min Operating Temperature=-40degC, Min Supply Voltage=3V, Package Description="24-Pin Quad Flat No-lead Package, Body 4 x 4 mm, Pitch 0.5 mm", Package Reference=QFN-24-2550x2550TP_A, Datasheet URL=http://www.silabs.com/documents/public/data-sheets/cp2102n-datasheet.pdf, Datasheet Version="Rev. 1.1, 08/2016", Manufacturer URL=http://www.silabs.com/, Mounting Technology=SurfaceMount, Number of Pins=24, REACH SVHC=Unknown, RoHSCompliant=False
U4: "Real Time Clock _RTC_ IC Clock/Calendar IÂ²C, 2-Wire Serial 8-SOIC _0.154, 3.90mm Width_", Package="VDFN-8 NXP USA", Supplier Part Number 1=568-5306-1-ND, Digi-Key_Part_Number=568-5306-1-ND, Digi-Key_Purchase_URL=https://www.digikey.com/product-detail/en/nxp-usa-inc/PCF8523T-1,118/568-5306-1-ND/2530784?utm_source=snapeda&utm_medium=aggregator&utm_campaign=symbol, MF="NXP USA", MP=PCF8523T, SnapEDA_Link=https://www.snapeda.com/parts/PCF8523T/NXP%20USA%20Inc./view-part/3227764/?ref=snap, Supplier 1=Digi-Key
U5: library part CMP-04910-000009-1, "PWR MGMT BATTERY MGMT", Manufacturer="Texas Instruments", Max Junction Temp=+125°C, Max Supply Voltage=22V, Min Supply Voltage=2.8V, Nominal Supply Current=300uA, Output Current=1.5-5.2A, Package=RUX0012A, Temperature="-40°C to +125°C", Temperature Range Low=-40°C, Automotive=No, Category=IC, ComponentLink2Description=Datasheet, ComponentLink2URL=https://www.ti.com/lit/ds/symlink/tps2121.pdf, Device Class L1="Integrated Circuits (ICs)", Device Class L2="Power Management ICs", Device Class L3=unset, Digikey Description="PWR MGMT BATTERY MGMT", Height=1mm, Lead Free=Yes, Manufacturer Part Number=TPS2121RUXR, Mouser Description="2.7-22V, 56m?, 4.5A, Priority Power MUX with Seamless Switchover 12-VQFN-HR -40 to 125", Number Of Outputs=1, Octopart=https://octopart.com/tps2121ruxr-texas+instruments-95511053, Output Voltage=22V, RoHS=TRUE, Standoff Height=0mm, Temperature Range High=+125°C
Y1: library part ECS-.327-12.5-34B-TR, "32.768kHz Â±20ppm Crystal 12.5pF 70 kOhms 2-SMD, No Lead", Package="SMD-2 ECS International", Availability=Unavailable, MF="ECS Inc.", MP=ECS-.327-12.5-34B-TR, Price=None, SnapEDA_Link=https://www.snapeda.com/parts/ECS-.327-12.5-34B-TR/ECS%20Inc./view-part/55052/?ref=snap

## Free pads (board coordinates)
  round 3.2 hole 3 unplated: 3(4,4) 3(4,72) 3(81,4) 3(81,72)

## Via types
v1: diameter 1.27, hole 0.711, Top Layer to Bottom Layer, 39 vias
v2: diameter 0.5, hole 0.2, Top Layer to Bottom Layer, 4 vias
v3: diameter 0.4, hole 0.2, Top Layer to Bottom Layer, 4 vias

## Nets (pads, with @x,y where several pads share a name; then routed paths per layer and width w, separated by ;. In a path a pad name is that pad's centre, name@x,y a point inside that pad or via, vN(x,y) a via of type N, cw(c..) or ccw(c..) an arc to the next point about the centre after c; other vN are vias at no path point)
A1: J3.2 U1.5
A2: J4.2 U1.7
A3: J5.2 U1.9
Ctrl_1: Q3.1 R7.2 R8.2 U1.11 | length 2.6
  Top Layer w0.3: R8.2 56.845,20.257 Q3.1
D+: D2.4 J1.A6 J1.B6 U3.3 | length 14
  Top Layer w0.3: U3.3 62.893,53.662 62.897,53.658 70.118,53.658 70.721,53.056 v1(70.779,53.056) ; J1.A6 78.725,57.885 78.775,57.935 78.999,57.935 79.175,58.111 79.175,58.659 ; J1.B6 78.949,58.885 79.175,58.659 ; v1(80.264,59.182) 79.741,58.659 79.175,58.659
  Bottom Layer w0.3: v1@80.137,59.055 v1(80.264,59.182)
D-: D2.3 J1.A7 J1.B7 U3.4 | length 15.8
  Top Layer w0.3: U3.4@61.049,54.166 U3.4 73.323,54.162 v1(73.446,54.039) ; D2.3 74.908,57.062 D2.3@75.231,57.385 ; J1.B7 77.651,57.385 77.425,57.611 77.425,58.159 77.651,58.385 J1.A7
  Bottom Layer w0.3: v1(73.446,54.039) v1@73.446,54.199
EN: C6.2 Q4.3 R2.1 SW1.3 SW1.4 U1.3 | length 37.6
  Top Layer w0.3: U1.3 7.78,26.686 R2.1 7.903,26.795 C6.2 10.266,26.988 10.52,26.734 v1(11.724,26.734) ; v1(23.154,26.734) 27.236,26.734 31.135,30.633 SW1.3 ; SW1.4 33.786,42.414 34.046,42.674 34.046,42.724 34.296,42.974 Q4.3 Q4.3@34.203,43.117
  Bottom Layer w0.3: v1(11.724,26.734) v1(23.154,26.734)
GND: BT.NEG C1.1 C2.1 C3.1 C4.2 C5.1 C6.1 C7.1 C9.1 C10.1 C11.1 C12.1 C13.1 D2.1 D3.1 D4.1 D5.NEG J1.A1/B12 J1.B1/A12 J2.2 J3.3 J4.3 J5.3 Q3.2 R1.1 R3.1 R8.1 R15.1 R18.1 SW1.2 SW2.2 U1.1 U1.15 U1.38 U1.39 U2.1 U3.2 U4.4 U5.3 U5.4 U5.5 U5.9 U5.12 | length 162.5
  Top Layer w0.3: C7.1 v1(20.006,54.52) ; SW1.2 v1(29.286,40.668) ; D4.1 30.158,23.051 31.282,21.927 v1(31.282,21.527) 33.137,21.527 34.534,22.924 D3.1 ; v1(36.362,40.45) 36.362,39.635 SW2.2 ; U3.2 61.877,53.162 v1(63.032,52.007) ; C12.1@61.765,59.012 C12.1 ; v1(63.413,30.671) 63.413,33.042 65.476,35.105 U5.9 ; U5.5 U5.4 U5.3 67.58,37.505 68.239,38.164 69.001,38.164 70.144,39.307 v1(71.033,39.307) ; U5.12 66.976,35.105 67.727,34.354 v1(69.763,34.354)
  Top Layer w0.6: C1.1 2.604,25.56 3.507,26.463 3.507,27.876 5.24,29.609 U1.1 5.247,31.63 5.247,33.338 8.904,36.995 10.612,36.995 U1.39@10.905,37.288 ; U1.38 5.24,46.623 U1.39@10.905,40.958 ; v1(8.93,39.18) 8.959,39.151 10.877,39.151 U1.39@10.905,39.123 ; U4.4@10.036,65.469 U4.4 10.073,64.862 U4.4@10.068,64.857 ; v1(10.073,22.416) C6.1 ; v1(12.74,34.862) U1.39@12.74,37.288 ; v1(12.74,43.371) U1.39@12.74,40.958 ; v1(16.296,39.18) 16.268,39.151 14.604,39.151 U1.39@14.575,39.123 ; U1.15 20.01,34.408 17.13,37.288 14.575,37.288 U1.39@12.74,37.288 ; C10.1 C9.1 v1(52.237,62.929) ; v1(50.332,28.004) 50.332,31.864 C4.2 51.099,31.859 U2.1 55.418,30.165 55.967,29.616 55.967,29.293 C5.1 ; D5.NEG 56.358,13.796 56.628,13.526 v1(56.809,13.526) R8.1 56.852,18.4 59.306,18.4 Q3.2 ; R15.1 57.313,60.769 57.907,60.175 57.907,60.011 58.12,59.799 58.12,59.795 58.453,59.462 58.814,59.462 C11.1 59.284,58.993 61.746,58.993 C12.1@61.765,59.012 ; C12.1 61.95,59.119 62.023,59.046 64.991,59.046 v1(65.064,59.119) ; v1(63.413,30.671) 63.498,30.671 64.151,30.018 R1.1 65.868,30.06 68.324,30.06 C13.1 ; R18.1 68.183,41.794 69.435,41.794 70.992,40.237 70.992,39.348 v1(71.033,39.307) ; D2.1 72.458,60.927 72.809,61.278 v1(75.478,61.278) 75.535,61.335 J1.B1/A12 ; v1(76.962,49.784) 77.001,49.823 C3.1 ; J1.A1/B12 78.025,54.935 76.962,53.872 76.962,52.088 79.031,50.019 79.031,49.969 C3.1 ; R3.1 79.172,47.567 79.172,49.817 C3.1 ; U1.39@10.905,37.288 U1.39@10.905,39.123 ; U1.39@10.905,37.288 U1.39@12.74,37.288 ; U1.39@10.905,39.123 U1.39@10.905,40.958 ; U1.39@10.905,40.958 U1.39@12.74,40.958 ; U1.39@12.74,37.288 12.74,39.123 U1.39@14.575,39.123 ; U1.39@12.74,40.958 14.575,40.958 U1.39@14.575,39.123
GPIO0: Q5.3 U1.25 | length 13.3
  Top Layer w0.3: U1.25 32.584,48.623 34.296,46.911 Q5.3
nDTR: Q5.2 R16.2 U3.23 | length 27.3
  Top Layer w0.3: Q5.2 39.574,47.861 41.242,46.193 R16.2 41.668,46.419 v1(43.093,46.419) ; v1(46.522,46.419) 55.505,46.419 59.845,50.759 U3.23
  Bottom Layer w0.3: v1(43.093,46.419) v1(46.522,46.419)
NetBT_S1+: BT.S1+ BT.S2+ U4.3
NetC3_2: C3.2 J1.S1 J1.S2 J1.S3 J1.S4 R3.2 | length 24.3
  Top Layer w0.3: J1.S1 J1.S3 ; J1.S2 J1.S4 J1.S3 ; R3.2 81.077,47.573 C3.2 81.077,49.873 81.627,50.423 81.677,50.423 82.805,51.551 J1.S3
NetC5_2: C5.2 U2.3 U5.8 | length 12
  Top Layer w0.6: C5.2 58.267,28.943 59.778,30.454 59.778,31.659 62.173,31.659 62.524,32.01 62.524,33.846 64.633,35.955 65.501,35.955 U5.8
  other v3: 65.826,36.005
NetC7_2: C7.2 R11.2 U4.8 | length 6.8
  Top Layer w0.3: U4.8 13.883,59.682 14.645,58.92 R11.2 17.237,56.495 C7.2
NetC8_1: C8.1 SW2.1 | length 2.7
  Top Layer w0.3: SW2.1 37.914,30.133 37.914,29.362 38.714,28.562 C8.1
NetC9_2: C9.2 C10.2 R12.2 R15.2 U3.8 | length 12.6
  Top Layer w0.3: C10.2 52.137,58.87 C9.2 54.79,58.97 R12.2 55.167,59.119 57.313,59.119 57.313,58.394 58.022,57.685 58.657,57.685 59.857,56.486 59.857,56.237 59.845,56.225 U3.8
NetC11_2: C11.2 C12.2 R9.1 U3.5 U3.6 | length 36.2
  Top Layer w0.3: R9.1 50.741,64.545 53.288,64.545 v1(55.158,62.675) ; C11.2@59.325,60.873 C12.2 61.854,60.873 63.089,62.108 63.862,62.108 v1(64.048,62.294) ; U3.5 62.25,54.662 v1@62.75,55.162 ; U3.6 v1@62.75,55.162 ; v1@63.012,55.162 v1@62.75,55.162
  Bottom Layer w0.3: v1(55.158,62.675) 55.539,62.294 v1(64.048,62.294) 64.048,56.198 v1(63.032,55.182)
NetC13_2: C13.2 U5.11 | length 4
  Top Layer w0.3: U5.11 66.476,33.842 68.316,32.002 C13.2
NetD3_2: D3.2 R5.1 | length 2.2
  Top Layer w0.3: R5.1 32.67,23.138 D3.2
NetD4_2: D4.2 R6.1 | length 2.1
  Top Layer w0.3: R6.1 28.233,23.226 D4.2
NetD5_POS: D5.POS R7.1
NetP1_1: P1.1 Q3.3
NetQ4_1: Q4.1 R16.1 | length 6.1
  Top Layer w0.3: Q4.1 37.602,42.024 37.698,41.928 38.827,41.928 41.242,44.343 R16.1
NetQ5_1: Q5.1 R17.1 | length 3
  Top Layer w0.3: Q5.1 39.051,45.961 R17.1
NetR1_2: R1.2 U5.10 | length 3.2
  Top Layer w0.3: R1.2 65.976,32.218 U5.10
NetR4_1: R4.1 R18.2 U5.6 | length 5.1
  Top Layer w0.3: U5.6 65.476,40.1 R4.1 67.731,40.196 R18.2
NetR9_2: R9.2 U3.9 | length 13.9
  Top Layer w0.3: R9.2 47.172,58.776 47.647,58.301 47.647,58.151 48.563,57.235 58.471,57.235 59.345,56.361 U3.9
NetR10_1: R10.1 SW2.4 | length 2.6
  Top Layer w0.3: SW2.4 44.329,38.583 R10.1
NetU4_1: U4.1 Y1.2 | length 6.4
  Top Layer w0.3: U4.1 13.883,64.852 14.028,64.707 14.709,64.707 15.534,63.882 15.534,61.855 15.71,61.679 Y1.2
NetU4_2: U4.2 Y1.1 | length 8.9
  Top Layer w0.3: U4.2 12.613,67.247 12.994,67.628 15.28,67.628 17.185,65.723 Y1.1
nRTS: Q4.2 R17.2 U3.19 | length 28.3
  Top Layer w0.3: Q4.2 36.396,43.924 36.815,44.343 R17.2@39.083,44.343 ; v1(38.267,42.863) 38.267,43.125 38.708,43.566 38.708,43.968 R17.2@39.083,44.343 ; R17.2 R17.2@39.083,44.343 ; v1(55.621,51.962) U3.19
  Bottom Layer w0.3: v1(38.267,42.863) 46.522,42.863 v1(55.621,51.962)
Power_A1: J3.1 U1.6
Power_A2: J4.1 U1.8
Power_A3: J5.1 U1.10
RXD0: U1.34 U3.21 | length 52.2
  Top Layer w0.3: U1.34 10.32,49.173 10.832,49.685 10.832,49.739 11.449,50.356 23.871,50.356 24.154,50.073 v1(36.838,50.073) ; v1(43.728,50.61) 44.617,49.721 58.171,49.721 58.845,50.395 U3.21
  Bottom Layer w0.3: v1(36.838,50.073) 37.101,50.073 37.638,50.61 v1(43.728,50.61)
SCL: R14.1 U1.36 U4.6 | length 14.2
  Top Layer w0.3: U1.36 7.78,53.397 8.713,54.33 v1(8.893,54.33) ; v1(9.057,56.579) R14.1 10.644,56.779 11.343,57.478 U4.6
  Bottom Layer w0.3: v1(8.893,54.33) 8.803,54.42 8.803,54.928 9.057,55.182 v1(9.057,56.579)
SDA: R13.1 U1.37 U4.5 | length 16.7
  Top Layer w0.3: U1.37 6.81,48.923 6.81,53.57 8.833,55.593 ; U4.5 10.073,58.484 9.438,57.849 9.005,57.849 8.122,56.966 8.122,56.192 8.72,55.593 9.707,55.593 10.68,54.62 R13.1@10.68,54.22
TXD0: U1.35 U3.20 | length 53.3
  Top Layer w0.3: U1.35 9.05,49.173 9.562,49.685 9.562,49.739 11.322,51.499 24.402,51.499 24.417,51.484 v1(36.997,51.484) ; v1(41.95,52.007) 44.236,52.007 45.887,50.356 58.169,50.356 58.345,50.532 U3.20
  Bottom Layer w0.3: v1(36.997,51.484) 37.259,51.484 37.782,52.007 v1(41.95,52.007)
USER_LED: R6.2 U1.16 | length 23
  Top Layer w0.3: U1.16 25.386,35.678 28.234,32.83 33.852,32.83 35.6,31.082 35.6,30.55 30.283,25.233 R6.2
USER_SW: C8.2 SW2.3 U1.23 | length 28.6
  Top Layer w0.3: U1.23 23.3,44.568 23.812,44.056 23.866,44.056 26.189,41.733 26.189,39.831 31.412,34.608 37.124,34.608 40.99,30.742 41.68,30.742 41.914,30.508 41.164,29.758 41.164,29.112 41.164,29.062 C8.2
V3.3: C1.2 C2.2 C4.1 R2.2 R5.2 R10.2 R11.1 R13.2 R14.2 U1.2 U2.4 | length 135.2
  Top Layer w0.6: R5.2 39.918,25.083
  Top Layer w1: C2.2 5.12,26.276 6.51,27.666 U1.2 ; C2.2@5.604,25.692 C1.2 5.679,23.23 5.679,22.365 7.787,20.257 ; R2.2 7.787,20.257 ; v1(8.93,20.13) 8.878,20.182 7.862,20.182 7.787,20.257 ; R14.2 12.494,54.656 12.705,54.445 R11.1 14.77,54.32 14.92,54.32 16.471,52.769 38.56,52.769 45.237,46.092 45.237,44.021 46.751,42.507 49.838,39.42 49.888,39.42 50.713,38.595 C4.1 57.362,38.495 U2.4 ; v1(34.965,20.13) 39.918,25.083 46.776,31.941 46.776,36.894 ; R10.2 46.776,36.894 ; 46.776,42.532 46.776,36.894
  Bottom Layer w1: v1(8.93,20.13) 10.2,18.86 33.695,18.86 v1(34.965,20.13)
VBUS: D2.2 J1.A4/B9 J1.B4/A9 R4.2 R12.1 U3.7 U5.7 | length 72.2
  Top Layer w0.6: R12.1 55.054,60.906 57.908,63.76 65.51,63.76 D2.2@72.081,57.189 ; 60.495,55.987 61.697,57.189 D2.2@72.081,57.189 ; U5.7@65.501,36.755 64.695,36.755 63.413,38.037 63.413,40.087 65.372,42.046 R4.2 65.772,42.046 65.997,42.271 65.997,42.471 75.478,51.952 75.478,55.679 75.534,55.735 ; J1.A4/B9 77.589,55.735 ; J1.B4/A9 77.589,60.535 76.835,59.781 76.835,58.418 76.825,58.408 76.825,57.362 76.835,57.352 76.835,56.489 77.589,55.735 ; D2.2@72.081,57.189 72.331,57.189 D2.2 72.556,57.062 72.706,56.912 72.706,56.086 73.057,55.735 75.534,55.735 ; 75.534,55.735 77.589,55.735
  other v3: 65.826,36.705
"VEXT 12V": J2.1 P1.2 U5.2
  other v3: 66.626,36.705
pads on no net: J1. J1.A5 J1.A8 J1.B5 J1.B8 J2. J2.3 SW1.1 U1.4 U1.12 U1.13 U1.14 U1.17 U1.18 U1.19 U1.20 U1.21 U1.22 U1.24 U1.26 U1.27 U1.28 U1.29 U1.30 U1.31 U1.32 U1.33 U3.1 U3.10 U3.11 U3.12 U3.13 U3.14 U3.15 U3.16 U3.17 U3.18 U3.22 U3.24 U3.25 U4.7 U5.1
copper on no net:
  other v2: 58.545,53.362 59.645,53.362 58.545,54.462 59.645,54.462
  other v3: 66.626,36.005

## Polygon pours and split planes (outlines as drawn)
GND on Bottom Layer "NONET_L02_P001" (solid, shelved, pour order 1): -6.5,-4 -6.5,79.947 82.654,79.947 82.654,-4
no net on Bottom Layer "NONET_L02_P002" (solid, pour order 2): 80.518,3.556

## Keep-outs
Keep-Out Layer:
  region: 1.31,37.656

## Silkscreen, mask and mechanical layers (free items; w line width, h text height)
Top Overlay:
  text "ESP32 Automated Watering v1.0" at 53.657,64.389 h1.52
  text "VCC" at 50.228,12.827 h1.52 r90
  text "A3" at 48.323,12.319 h1.52 r90
  text "A2" at 33.083,12.065 h1.52 r90
  text "VCC" at 38.544,12.065 h1.52 r90
  text "GND" at 46.037,12.065 h1.52 r90
  text "A1" at 15.684,11.938 h1.52 r90
  text "VCC" at 21.526,11.049 h1.52 r90
  text "GND" at 11.239,10.922 h1.52 r90
  text "GND" at 28.003,10.795 h1.52 r90
Mechanical 1:
  the board outline again, w0.254